# Altium PCB Powerboost.PcbDoc
Units mil, origin at the board's own origin, x right, y up, seen from the top; angles counter-clockwise.
Board outline 2325 x 3920 mil, 2 copper layers (Top Layer, Bottom Layer); 56 components, 38 nets, 143 pads, 110 vias.
Unrouted connection lines stored in the file: 83.
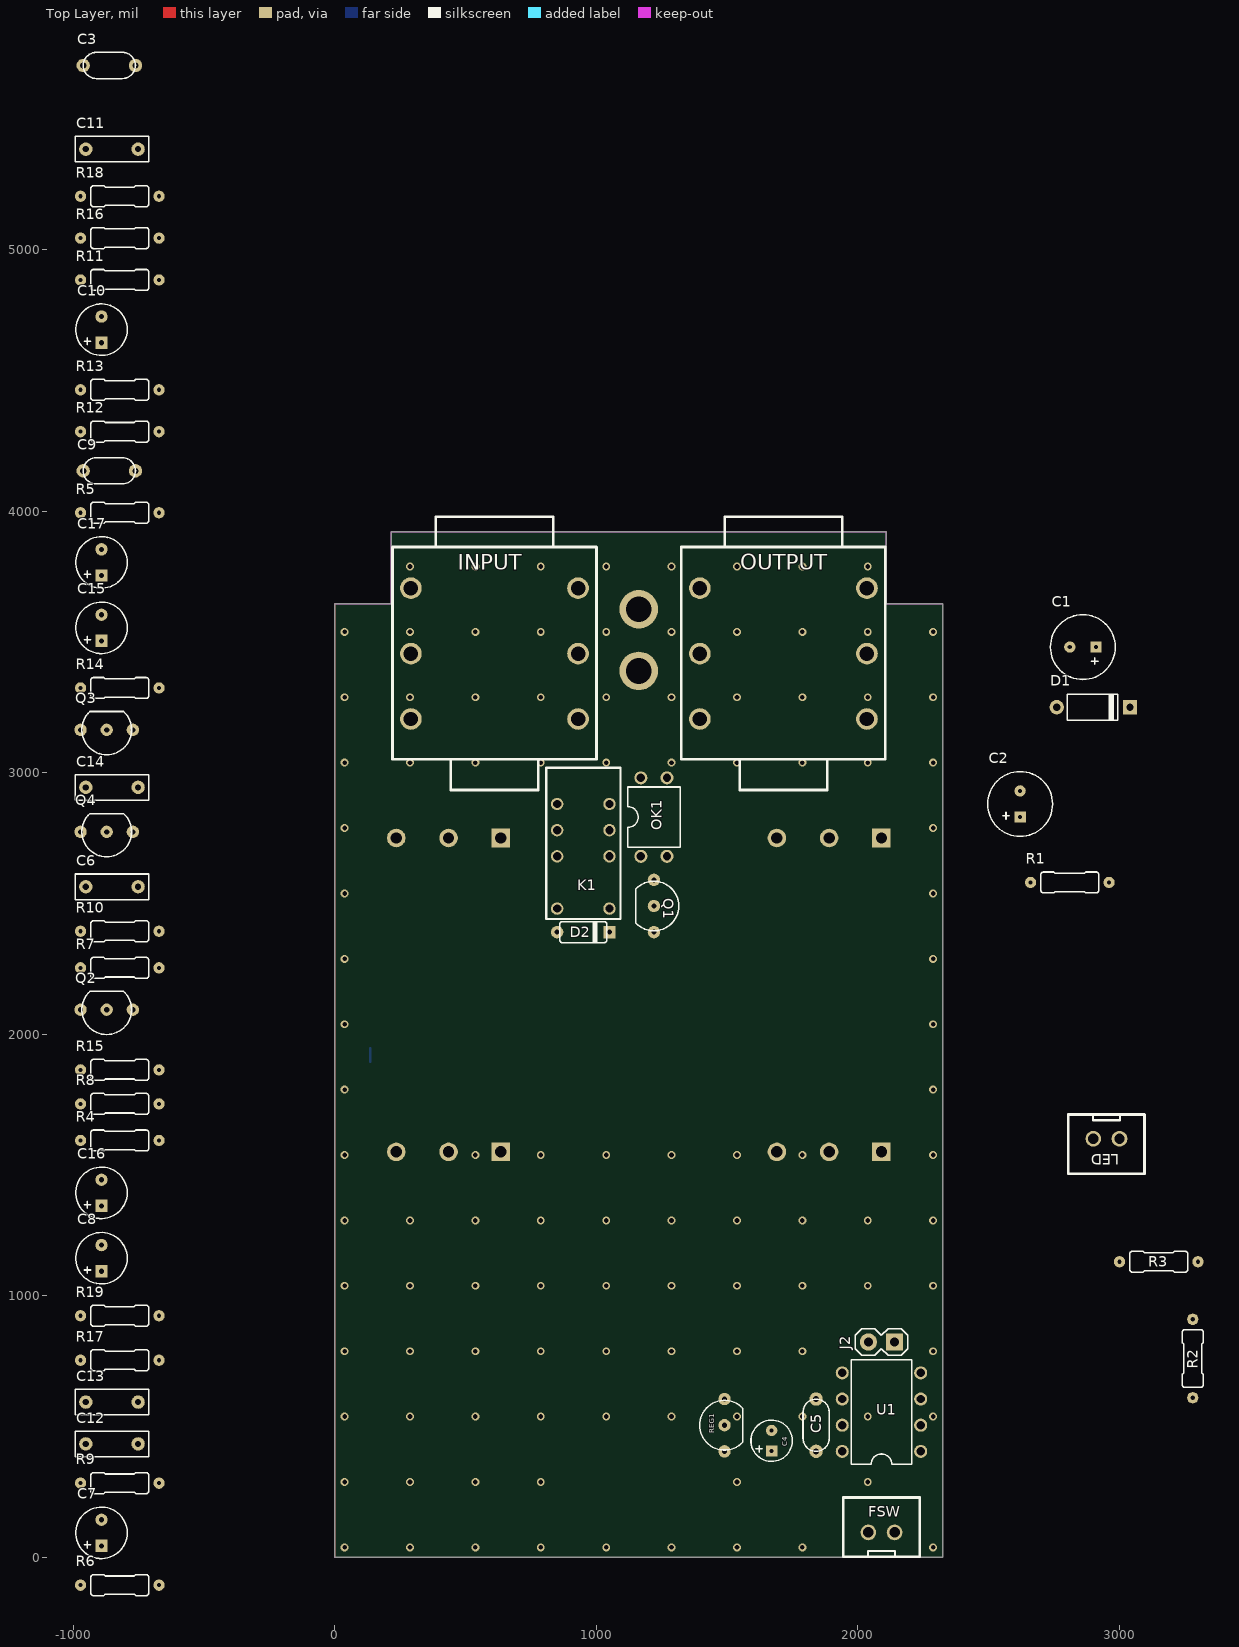
[diagram p0: Top Layer view]
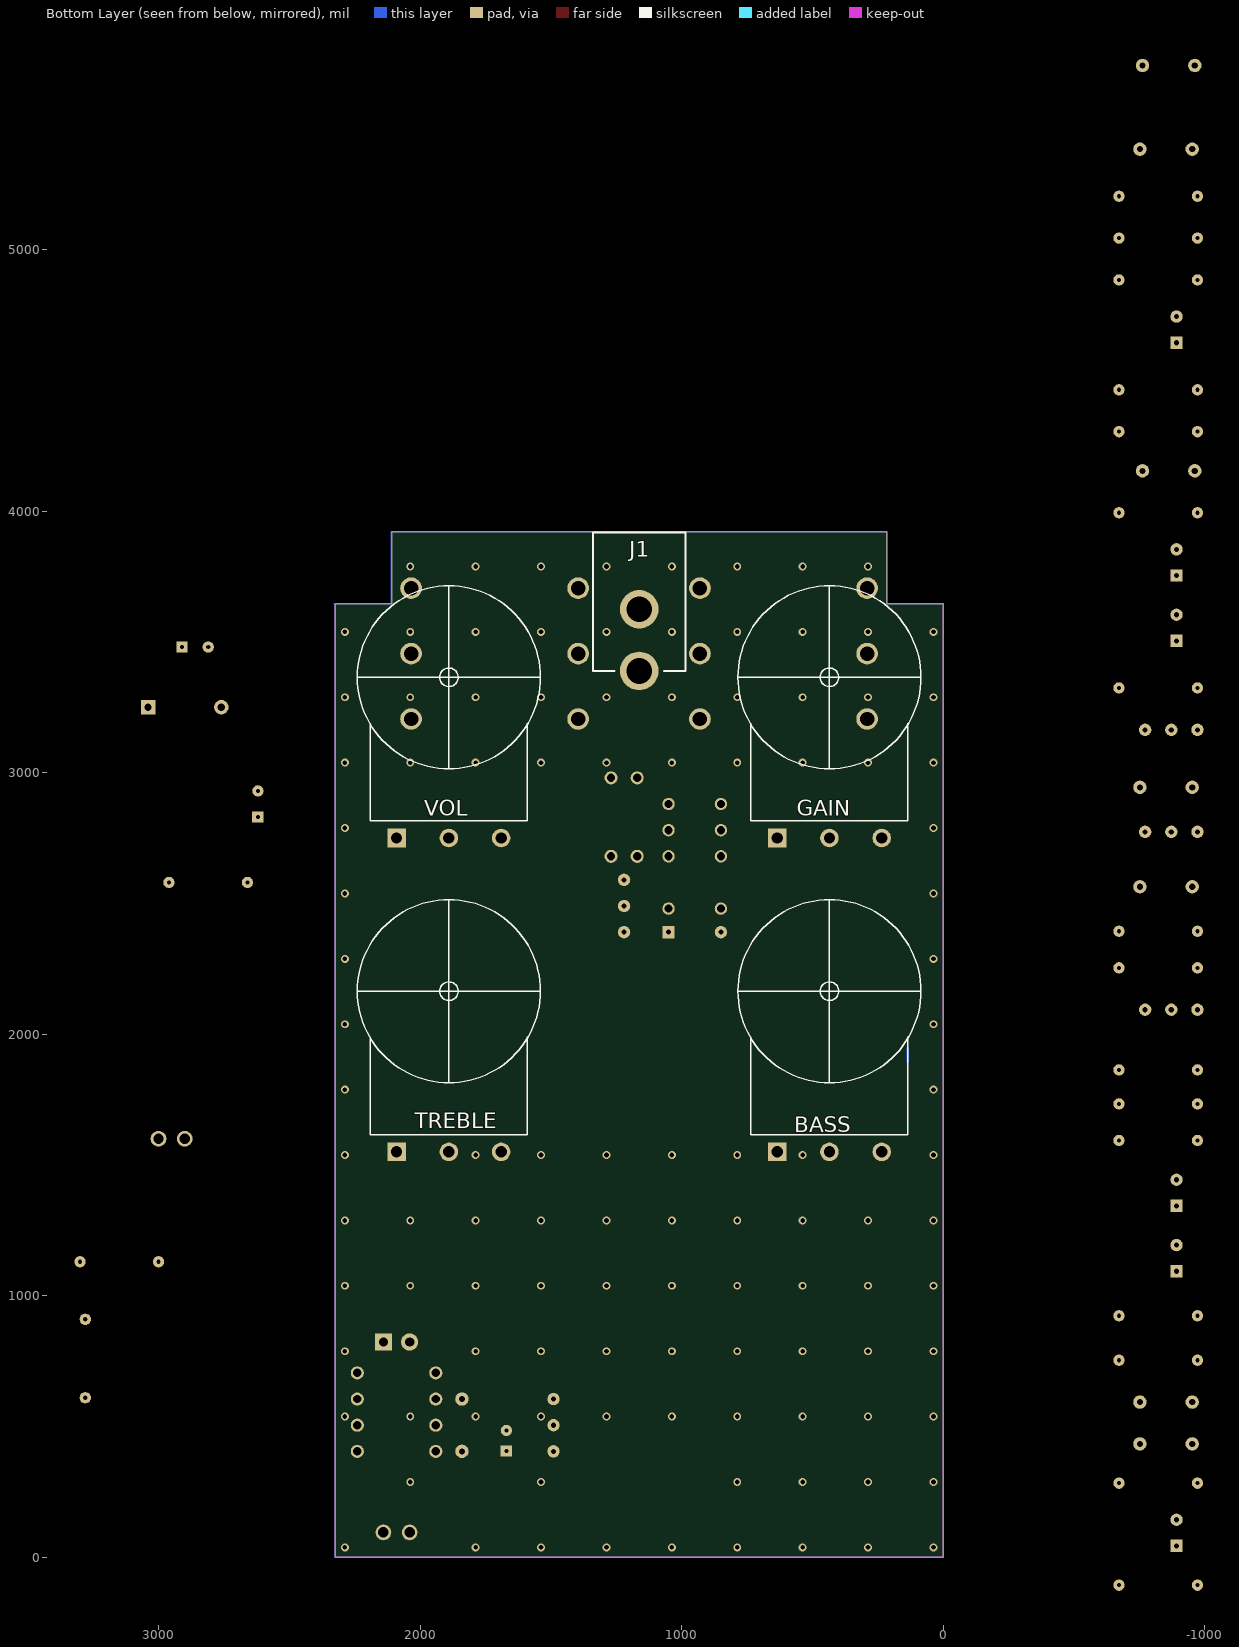
[diagram p1: Bottom Layer view, seen from below]

## Layer stack, top to bottom
Top Solder: solder mask 0.4, Solder Resist, Dk 3.5
Top Layer: signal copper 1.4
Dielectric 1: dielectric 12.6, FR-4, Dk 4.8
Bottom Layer: signal copper 1.4
Bottom Solder: solder mask 0.4, Solder Resist, Dk 3.5

## Board outline
2109,3920 2109,3645 2325,3645 2325,0 0,0 0,3645 216,3645 216,3920

## Design rules (kind name [scope] priority, off if disabled: settings)
Clearance [All] p1: gap=8 ignorepadtopadclearanceinfootprint=FALSE except(0: Arc-Text Arc-Hole Track-Text Track-Hole SMDPad-Text SMDPad-Hole THPad-Text THPad-Hole Via-Text Via-Hole Fill-Text Fill-Hole Poly-Text Poly-Hole Region-Text Region-Hole Text-Text Text-Hole; 10: Arc-SMDPad Track-SMDPad SMDPad-SMDPad SMDPad-THPad SMDPad-Via THPad-THPad; 18: Arc-Arc Arc-Track Arc-THPad Track-Track Track-THPad)
ComponentClearance [All] p1 off: gap=10 collisioncheckmode=3 verticalgap=100000 showdistances=FALSE
Height [All] p1: minheight=0 maxheight=99999 prefheight=50000
PolygonConnect [All] p1: connectstyle=Relief reliefconductorwidth=12 reliefentries=4 polygonreliefangle="90 Angle" airgapwidth=8
RoutingVias [All] p1: holewidth=30 width=30 viastyle="Through Hole" minholewidth=10 minwidth=15 maxholewidth=20 maxwidth=40
SilkToSilkClearance [All] p1: silktosilkclearance=8
SolderMaskExpansion [All] p1: expansion=4
UnRoutedNet [All] p1: checkbadconnections=TRUE
Width [All] p1: maxlimit=32 minlimit=10 preferedwidth=10 minimp=50.000000 maximp=50.000000 favimp=50.000000
26 further rules are at their usual default settings.

## Classes and differential pairs
component class Powerboost: BASS C1 C2 C3 C4 C5 C7 C8 C9 C10 C11 C12 C13 C14 C15 C16 C17 D1 D2 FSW GAIN INPUT J1 J2 K1 LED OK1 OUTPUT Q1 Q2 Q3 Q4 R1 R2 R3 R6 R7 R8 R9 R10 R11 R12 R13 R14 R15 R16 R17 R18 R19 REG1 TREBLE U1 VOL

## Components (designator, comment, footprint, x,y, rotation, side; value= is the part's Value field where it differs from the comment)
BASS "100kB" ALPHA_16mm_BOTTOM 435,1549.37 r180 bottom
C1 "100u" ELEC_063_025 2860,3480 r180 top
C2 "100u" ELEC_063_025 2620,2880 r90 top
C3 "100n" CER_050 -862,5703.5 r180 top
C4 "10u" ELEC_040_020 1670.08,445 r90 top
C5 "100n" CER_050 1840,505 r270 top
C6 "220n" FILMBOX_SMALL -852,2563.5 r180 top
C7 "22u" ELEC_LESR_050_020 -892,93.5 r90 top
C8 "22u" ELEC_LESR_050_020 -892,1143.5 r90 top
C9 "220p" CER_050 -862,4153.5 r180 top
C10 "4.7u" ELEC_LESR_050_020 -892,4693.5 r90 top
C11 "100n" FILMBOX_SMALL -852,5383.5 r180 top
C12 "10n" FILMBOX_SMALL -852,433.5 r180 top
C13 "10n" FILMBOX_SMALL -852,593.5 r180 top
C14 "100n" FILMBOX_SMALL -852,2943.5 r180 top
C15 "22u" ELEC_LESR_050_020 -892,3553.5 r90 top
C16 "22u" ELEC_LESR_050_020 -892,1393.5 r90 top
C17 "4.7u" ELEC_LESR_050_020 -892,3803.5 r90 top
D1 "1N4002" DO41_2 2900,3250 r180 top
D2 "1N4148" DO35_2 950,2390 r180 top
FSW "" JST-XH-02 2090,95 r0 top
GAIN "1kC" ALPHA_16mm_BOTTOM 435,2749.37 r180 bottom
INPUT "" STEREO 610.51,3455 r90 top
J1 "DC_JACK" DC_JACK 1162.5,3808.15 r0 bottom
J2 "HEADER_2PINS" HEADER_2PINS 2090,823.16 r0 top
K1 "" NA5 950,2730 r90 top
LED "" JST-XH-02 2950,1600 r180 top
OK1 "TLP222G" DIL4 1220,2830 r0 top
OUTPUT "" STEREO 1715,3455 r90 top
Q1 "2N3904" TO92 1220,2490 r270 top
Q2 "2N3904" TO92 -872,2093.5 r180 top
Q3 "2N3904" TO92 -872,3163.5 r180 top
Q4 "2N3904" TO92 -872,2773.5 r180 top
R1 "47R" R_3_47R_025W 2810,2580 r180 top
R2 "1k" R_3_1k_025W 3280,760 r90 top
R3 "22k" R_3_22k_025W 3150,1130 r180 top
R4 "2,2M" R_3_2,2M_025W -822,1593.5 r180 top
R5 "120k" R_3_120k_025W -822,3993.5 r180 top
R6 "4.7k" R_3_4.7k_025W -822,-106.5 r180 top
R7 "12k" R_3_12k_025W -822,2253.5 r180 top
R8 "150k" R_3_150k_025W -822,1733.5 r180 top
R9 "1.2k" R_3_1.2k_025W -822,283.5 r180 top
R10 "470R" R_3_470R_025W -822,2393.5 r180 top
R11 "1.8k" R_3_1.8k_025W -822,4883.5 r180 top
R12 "4.7k" R_3_4.7k_025W -822,4303.5 r180 top
R13 "4.7k" R_3_4.7k_025W -822,4463.5 r180 top
R14 "39k" R_3_39k_025W -822,3323.5 r180 top
R15 "5.6k" R_3_5.6k_025W -822,1863.5 r180 top
R16 "180k" R_3_180k_025W -822,5043.5 r180 top
R17 "33k" R_3_33k_025W -822,753.5 r180 top
R18 "3.9k" R_3_3.9k_025W -822,5203.5 r180 top
R19 "1k" R_3_1k_025W -822,923.5 r180 top
REG1 "LM78L05" TO92 1490,505 r90 top
TREBLE "100kB" ALPHA_16mm_BOTTOM 1890,1549.37 r180 bottom
U1 "ATTINY85" DIP8 2090,555 r90 top
VOL "100kA" ALPHA_16mm_BOTTOM 1890,2749.37 r180 bottom

## Footprints (in the part's own frame and the unit in brackets; to place one, negate y for a bottom-side part, rotate by r counter-clockwise, add the part's x,y. Pads: shape width x height; smd on the part's side, far side on the other; paste and mask are expansions set on the pad)
ALPHA_16mm_BOTTOM [mil]
  rect 70.87x70.87 hole 43.31: 1(-200,0.63)
  round 70.87 hole 43.31: 2(0,0.63) 3(200,0.63)
  silkscreen extent -350,66 350,965, body extent -330,-16 445,966, height 960
CER_050 [mil]
  round 51.18 hole 23.62: 1(-100,0) 2(100,0)
  silkscreen extent -100,-50 100,50, body extent -117,-49 110,66, height 196
DC_JACK [mil]
  round 147.65 hole 98.43: GND(0,183.15) PWR(0,419.37)
  silkscreen extent -177,-110 177,419, body extent -350,-113 201,457, height 437
DIL4 [mil]
  round 50 hole 32: 1(-50,-150) 2(50,-150) 3(50,150) 4(-50,150)
  silkscreen extent -100,-115 100,115, body extent -90,-173 90,173, height 174
DIP8 [mil]
  round 50 hole 32: 1(-150,-150) 2(-50,-150) 3(50,-150) 4(150,-150) 5(150,150) 6(50,150) 7(-50,150) 8(-150,150)
  silkscreen extent -200,-115 200,115, body extent -225,-200 225,200, height 335
DO35_2 [mil]
  round 47.24 hole 19.69: A(100,0)
  rect 47.24x47.24 hole 19.69: C(-100,0)
  silkscreen extent -90,-40 90,40, body extent -108,-30 108,30, height 60
DO41_2 [mil]
  round 55.12 hole 27.56: A(140,0)
  rect 55.12x55.12 hole 27.56: C(-140,0)
  silkscreen extent -94,-50 100,50, body extent -154,-52 154,52, height 112
ELEC_040_020 [mil]
  rect 43.31x43.31 hole 15.75: +(-38.8,0)
  round 43.31 hole 15.75: -(40,0)
  silkscreen extent -78,-79 80,79, body extent -79,-79 79,79, height 277
ELEC_063_025 [mil]
  rect 43.31x43.31 hole 15.75: +(-50,0)
  round 43.31 hole 15.75: -(50,0)
  silkscreen extent -124,-124 124,124, body extent -118,-118 118,118, height 314
ELEC_LESR_050_020 [mil]
  rect 47.24x47.24 hole 19.69: +(-50,0)
  round 47.24 hole 19.69: -(50,0)
  silkscreen extent -98,-98 98,98, body extent -98,-98 98,100, height 434
FILMBOX_SMALL [mil]
  round 51.18 hole 23.62: 1(-100,0) 2(100,0)
  silkscreen extent -141,-49 141,49, body extent -142,-48 142,50, height 256
HEADER_2PINS [mil]
  rect 66x66 hole 35.43: 1(50,0)
  round 66 hole 35.43: 2(-50,0)
  silkscreen extent -100,-50 100,50, body extent -102,-50 102,50, height 330
JST-XH-02 [mil]
  round 60 hole 40: 1(-50,0) 2(50,0)
  silkscreen extent -146,-93 146,134, body extent -146,-95 146,131, height 276
NA5 [mil]
  round 47.25 hole 31.5: 1(-250,-100) 3(-50,-100) 4(50,-100) 5(150,-100) 8(150,100) 9(50,100) 10(-50,100) 12(-250,100)
  silkscreen extent -290,-142 289,142, body extent -291,-144 291,144, height 362
R_3_1.2k_025W [mil]
  round 43.31 hole 15.75: 1(-150,0) 2(150,0)
  silkscreen extent -111,-40 111,40, body extent -160,-38 160,38, height 83
R_3_1.8k_025W [mil]
  round 43.31 hole 15.75: 1(-150,0) 2(150,0)
  silkscreen extent -111,-40 111,40, body extent -160,-38 160,38, height 83
R_3_1k_025W [mil]
  round 43.31 hole 15.75: 1(-150,0) 2(150,0)
  silkscreen extent -111,-40 111,40, body extent -160,-38 160,38, height 83
R_3_2,2M_025W [mil]
  round 43.31 hole 15.75: 1(-150,0) 2(150,0)
  silkscreen extent -111,-40 111,40, body extent -160,-38 160,38, height 83
R_3_3.9k_025W [mil]
  round 43.31 hole 15.75: 1(-150,0) 2(150,0)
  silkscreen extent -111,-40 111,40, body extent -160,-38 160,38, height 83
R_3_4.7k_025W [mil]
  round 43.31 hole 15.75: 1(-150,0) 2(150,0)
  silkscreen extent -111,-40 111,40, body extent -160,-38 160,38, height 83
R_3_5.6k_025W [mil]
  round 43.31 hole 15.75: 1(-150,0) 2(150,0)
  silkscreen extent -111,-40 111,40, body extent -160,-38 160,38, height 83
R_3_12k_025W [mil]
  round 43.31 hole 15.75: 1(-150,0) 2(150,0)
  silkscreen extent -111,-40 111,40, body extent -160,-38 160,38, height 83
R_3_22k_025W [mil]
  round 43.31 hole 15.75: 1(-150,0) 2(150,0)
  silkscreen extent -111,-40 111,40, body extent -160,-38 160,38, height 83
R_3_33k_025W [mil]
  round 43.31 hole 15.75: 1(-150,0) 2(150,0)
  silkscreen extent -111,-40 111,40, body extent -160,-38 160,38, height 83
R_3_39k_025W [mil]
  round 43.31 hole 15.75: 1(-150,0) 2(150,0)
  silkscreen extent -111,-40 111,40, body extent -160,-38 160,38, height 83
R_3_47R_025W [mil]
  round 43.31 hole 15.75: 1(-150,0) 2(150,0)
  silkscreen extent -111,-40 111,40, body extent -160,-38 160,38, height 83
R_3_120k_025W [mil]
  round 43.31 hole 15.75: 1(-150,0) 2(150,0)
  silkscreen extent -111,-40 111,40, body extent -160,-38 160,38, height 83
R_3_150k_025W [mil]
  round 43.31 hole 15.75: 1(-150,0) 2(150,0)
  silkscreen extent -111,-40 111,40, body extent -160,-38 160,38, height 83
R_3_180k_025W [mil]
  round 43.31 hole 15.75: 1(-150,0) 2(150,0)
  silkscreen extent -111,-40 111,40, body extent -160,-38 160,38, height 83
R_3_470R_025W [mil]
  round 43.31 hole 15.75: 1(-150,0) 2(150,0)
  silkscreen extent -111,-40 111,40, body extent -160,-38 160,38, height 83
STEREO [mil]
  round 82.68 hole 55.12: R(0,319.49) RN(0,-319.49) S(250,319.49) SN(250,-319.49) T(-250,319.49) TN(-250,-319.49)
  silkscreen extent -522,-390 524,390, body extent -521,-358 730,358, height 632
TO92 [mil]
  round 47.24 hole 19.69: 1(100,0) 2(0,0) 3(-100,0)
  silkscreen extent -95,-70 95,95, body extent -109,-61 109,100, height 255

## Part data
BASS GAIN TREBLE VOL: library part ALPHA_16mm
C1 C2: library part ELEC_100u_25V
C3 C5: library part CER_100n
C4: library part ELEC_10u_50V
C6: library part FILMBOX_220n
C7 C8 C15 C16: library part ELEC_LESR_22u_50V
C9: library part CER_220p
C10 C17: library part ELEC_LESR_4.7u_50V
C11 C14: library part FILMBOX_100n
C12 C13: library part FILMBOX_10n
FSW LED: library part JST-XH-02
INPUT OUTPUT: library part STEREO
K1: library part NA5W-K, OC_FARNELL=unknown, OC_NEWARK=unknown
R1: library part R_3_47R_025W
R2 R19: library part R_3_1k_025W
R3: library part R_3_22k_025W
R4: library part R_3_2,2M_025W
R5: library part R_3_120k_025W
R6 R12 R13: library part R_3_4.7k_025W
R7: library part R_3_12k_025W
R8: library part R_3_150k_025W
R9: library part R_3_1.2k_025W
R10: library part R_3_470R_025W
R11: library part R_3_1.8k_025W
R14: library part R_3_39k_025W
R15: library part R_3_5.6k_025W
R16: library part R_3_180k_025W
R17: library part R_3_33k_025W
R18: library part R_3_3.9k_025W
OK1: OC_FARNELL=unknown, OC_NEWARK=unknown

## Via types
v1: diameter 30, hole 18, Top Layer to Bottom Layer, 110 vias

## Nets (pads, with @x,y where several pads share a name; then routed paths per layer and width w, separated by ;. In a path a pad name is that pad's centre, name@x,y a point inside that pad or via, vN(x,y) a via of type N, cw(c..) or ccw(c..) an arc to the next point about the centre after c; other vN are vias at no path point)
+5V: C4.+ C5.2 D2.C K1.1 R2.2 REG1.3 U1.8 | length 4.2
  Bottom Layer w32: REG1.3@1489.4,405.6 REG1.3 REG1.3@1490.6,405.6 ; C4.+@1669.48,405.6 1670.01,406.13 C4.+ C4.+@1670.68,405.6 ; C5.2@1839.4,405.6 C5.2
+9V: C1.+ D1.C J1.GND R1.1 REG1.1
GND: C1.- C2.- C3.2 C4.- C5.1 C8.- C16.- D1.A FSW.2 GAIN.1 GAIN.2 INPUT.S J1.PWR J2.1 OK1.2 OK1.3 OUTPUT.S Q1.3 R4.1 R6.1 R9.1 R17.1 R19.1 REG1.2 U1.4 VOL.1 | length 0.4
  Bottom Layer w15: GAIN.2 GAIN.2@435.26,2750.26
  other v1: 37.5,38 287.5,38 537.5,38 787.5,38 1037.5,38 1287.5,38 1537.5,38 1787.5,38 2287.5,38 37.5,288 287.5,288 537.5,288 787.5,288 1537.5,288 2037.5,288 37.5,538 287.5,538 537.5,538 787.5,538 1037.5,538 1287.5,538 1537.5,538 1787.5,538 2037.5,538 2287.5,538 37.5,788 287.5,788 537.5,788 787.5,788 1037.5,788 1287.5,788 1537.5,788 1787.5,788 2287.5,788 37.5,1038 287.5,1038 537.5,1038 787.5,1038 1037.5,1038 1287.5,1038 1537.5,1038 1787.5,1038 2037.5,1038 2287.5,1038 37.5,1288 287.5,1288 537.5,1288 787.5,1288 1037.5,1288 1287.5,1288 1537.5,1288 1787.5,1288 2037.5,1288 2287.5,1288 37.5,1538 537.5,1538 787.5,1538 1037.5,1538 1287.5,1538 1537.5,1538 1787.5,1538 2287.5,1538 37.5,1788 2287.5,1788 37.5,2038 2287.5,2038 37.5,2288 2287.5,2288 37.5,2538 2287.5,2538 37.5,2788 2287.5,2788 37.5,3038 287.5,3038 537.5,3038 787.5,3038 1037.5,3038 1287.5,3038 1537.5,3038 1787.5,3038 2037.5,3038 2287.5,3038 37.5,3288 287.5,3288 537.5,3288 787.5,3288 1037.5,3288 1287.5,3288 1537.5,3288 1787.5,3288 2037.5,3288 2287.5,3288 37.5,3538 287.5,3538 537.5,3538 787.5,3538 1037.5,3538 1287.5,3538 1537.5,3538 1787.5,3538 2037.5,3538 2287.5,3538 287.5,3788 537.5,3788 787.5,3788 1037.5,3788 1287.5,3788 1537.5,3788 1787.5,3788 2037.5,3788
INPUT: INPUT.T K1.9
NetBASS_1: BASS.1 C11.1 R13.1
NetBASS_2: BASS.2 R14.2
NetBASS_3: BASS.3 C11.2 R12.2
NetC6_1: C6.1 Q2.2 R8.1
NetC7_+: C7.+ Q2.3 R6.2 R7.1
NetC7_-: C7.- GAIN.3 | length 20.9
  Bottom Layer w10: GAIN.3 GAIN.3@235,2770.91
NetC8_+: C8.+ Q3.3 R10.2
NetC9_1: C9.1 C10.+ Q3.1 R7.2 R11.1
NetC9_2: C9.2 Q2.1 Q3.2 R5.1
NetC10_-: C10.- C12.2 R12.1
NetC12_1: C12.1 TREBLE.3
NetC13_1: C13.1 C15.- R13.2
NetC13_2: C13.2 TREBLE.1
NetC14_1: C14.1 Q4.2 R16.1 R17.2
NetC14_2: C14.2 R14.1 R15.2
NetC15_+: C15.+ C17.+ Q4.1 R18.1
NetC16_+: C16.+ Q4.3 R19.2
NetC17_-: C17.- VOL.3
NetD2_A: D2.A K1.12 LED.2 Q1.1
NetK1_3: K1.3 K1.10
NetLED_1: LED.1 R2.1
NetQ1_2: Q1.2 R3.2
NetR8_2: R8.2 R9.2 R10.1
NetR15_1: R15.1 TREBLE.2
OUTPUT: K1.4 OK1.4 OUTPUT.T
PB0: OK1.1 U1.5
PB1: J2.2 U1.6
PB2: U1.7
PB3: R3.1 U1.2
PB4: FSW.1 U1.3
PB5: U1.1
RETURN: K1.5 VOL.2
SEND: C6.2 K1.8 R4.2
Vr: C2.+ C3.1 R1.2 R5.2 R11.2 R16.2 R18.2
pads on no net: INPUT.R INPUT.RN INPUT.SN INPUT.TN OUTPUT.R OUTPUT.RN OUTPUT.SN OUTPUT.TN
copper on no net: | length 50
  Bottom Layer w10: 135,1895 135,1945

## Polygon pours and split planes (outlines as drawn)
GND on Top Layer "NONET_L01_P010" (solid, shelved, pour order 10): 0,0 2325,0 2325,3645 2110,3645 2110,3920 215,3920 215,3645 0,3645
GND on Bottom Layer "NONET_L02_P008" (solid, shelved, pour order 8): 0,0 2325,0 2325,3640 2330,3645 2110,3645 2110,3920 215,3920 215,3645 0,3645

## Keep-outs
Keep-Out Layer:
  the board outline again, w1